# Altium PCB IBV3.PcbDoc
Units mm, origin at the board's own origin, x right, y up, seen from the top; angles counter-clockwise.
Board outline 65 x 25 mm, 2 copper layers (Top Layer, Bottom Layer); 16 components, 14 nets, 56 pads, 0 vias.
Unrouted connection lines stored in the file: 32.
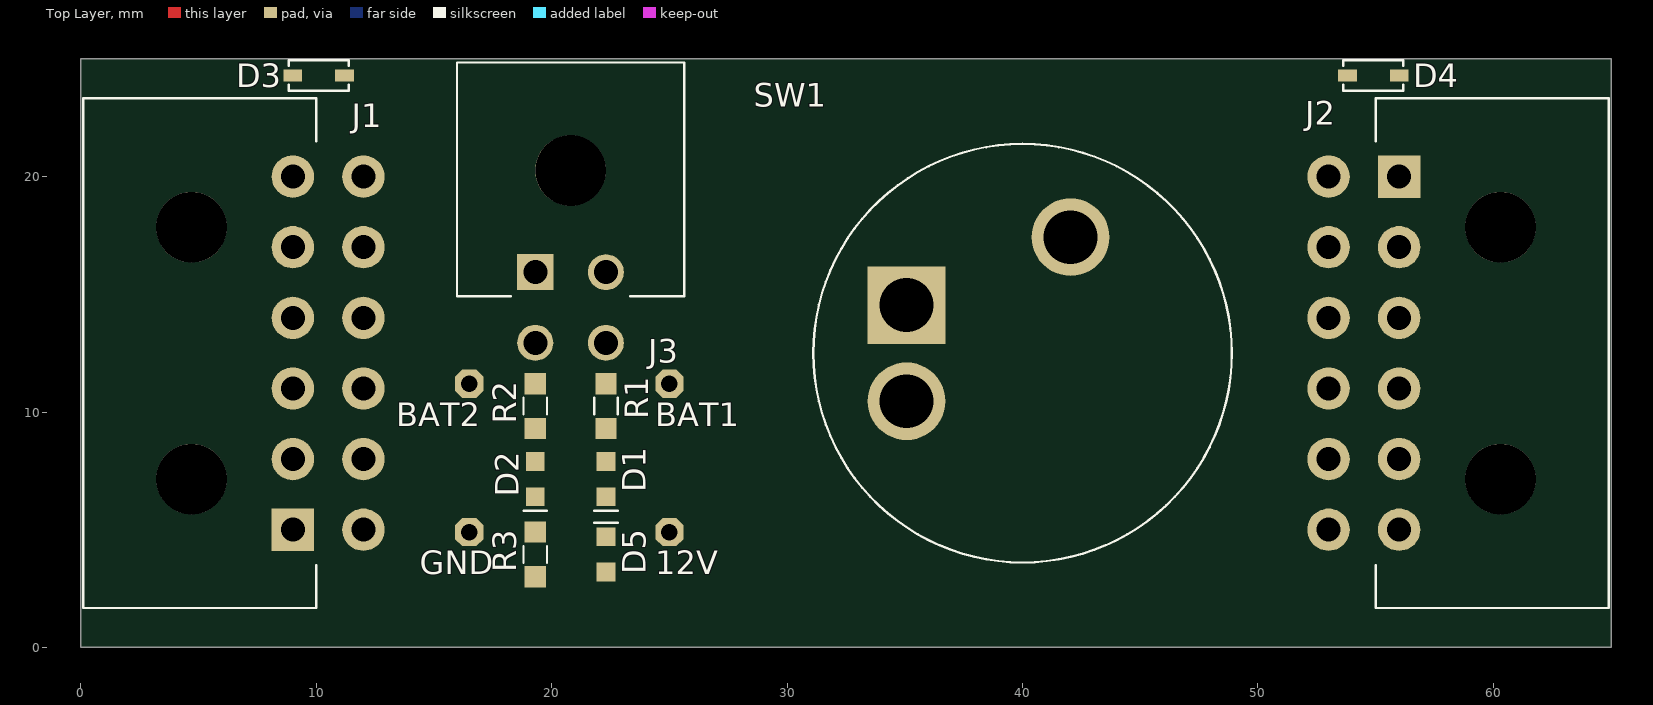
[diagram p0: Top Layer view]
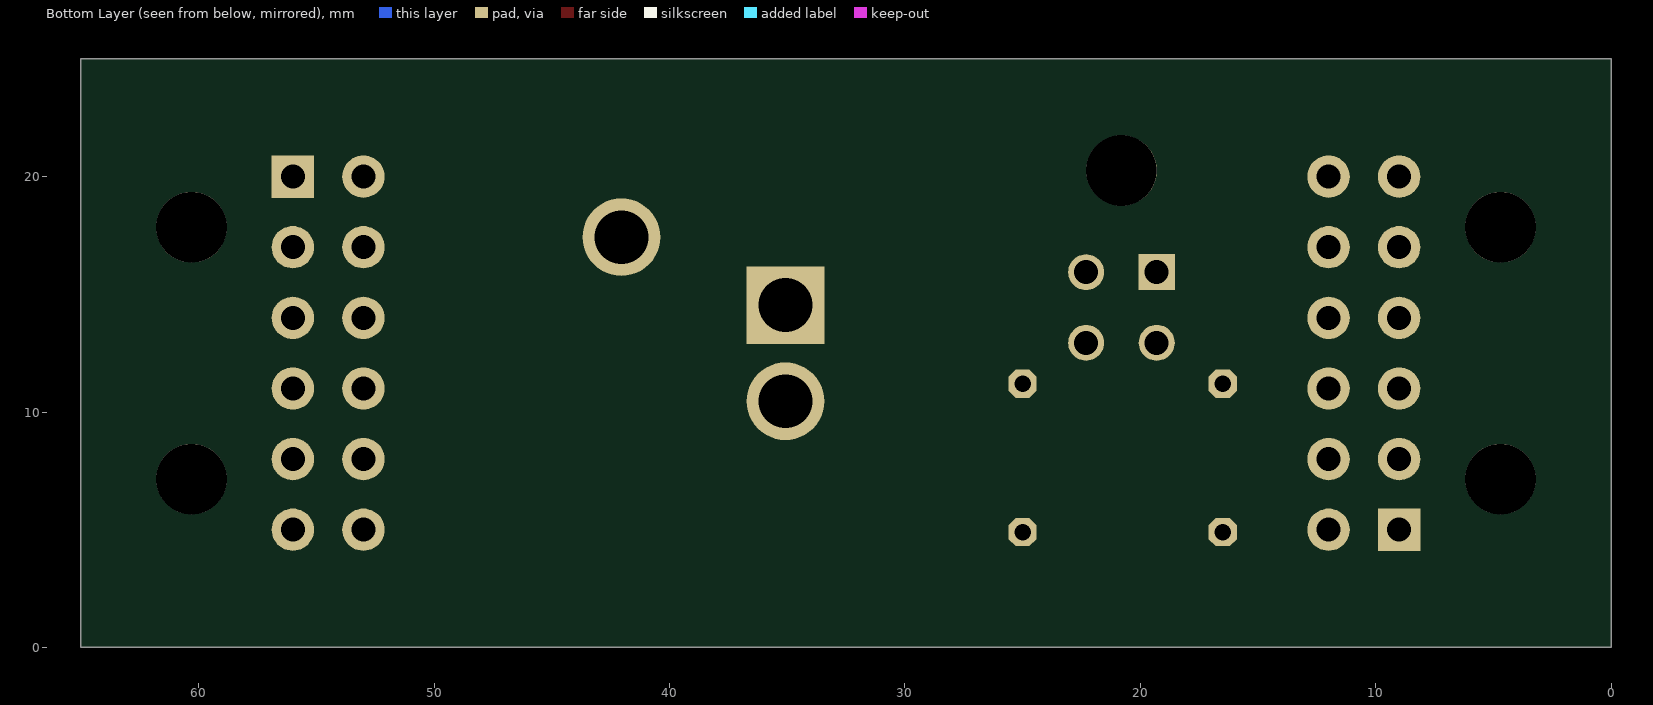
[diagram p1: Bottom Layer view, seen from below]

## Layer stack, top to bottom
Top Solder: solder mask 0.0102, Solder Resist, Dk 3.5
Top Layer: signal copper 0.0356
Dielectric 1: dielectric 0.32, FR-4, Dk 4.8
Bottom Layer: signal copper 0.0356
Bottom Solder: solder mask 0.0102, Solder Resist, Dk 3.5

## Board outline
0,0 0,25 65,25 65,0

## Design rules (kind name [scope] priority, off if disabled: settings)
Clearance [All] p1: gap=0.254 ignorepadtopadclearanceinfootprint=FALSE except(0: Arc-Hole Track-Hole SMDPad-Hole THPad-Hole Via-Hole Fill-Hole Poly-Hole Region-Hole Text-Hole)
Height [All] p1: minheight=0 maxheight=30 prefheight=12.7
HoleSize [All] p1: absolutevalues=TRUE maxlimit=10 minlimit=0.025 maxpercent=80.000 minpercent=20.000
MinimumSolderMaskSliver [All] p1: minsoldermaskwidth=0.076
PolygonConnect [All] p1: connectstyle=Relief reliefconductorwidth=0.254 reliefentries=4 polygonreliefangle="90 Angle" airgapwidth=0.254
RoutingVias [All] p1: holewidth=0.35 width=0.7 viastyle="Through Hole" minholewidth=0.25 minwidth=0.5 maxholewidth=0.711 maxwidth=1.27
SilkToSilkClearance [All] p1: silktosilkclearance=0.1
SilkToSolderMaskClearance [IsPad] p1: minsilkscreentomaskgap=0.09 clearancetoexposedcopper=TRUE
SolderMaskExpansion [All] p1: expansion=0.05
Width [All] p1: maxlimit=1.2 minlimit=0.2 preferedwidth=0.25 minimp=50.000000 maximp=50.000000 favimp=50.000000
25 further rules are at their usual default settings.

## Components (designator, comment, footprint, x,y, rotation, side; value= is the part's Value field where it differs from the comment)
12V "Testpoint" Testpoint 25,4.9 r90 top
BAT1 "Testpoint" Testpoint 25,11.2 r90 top
BAT2 "Testpoint" Testpoint 16.5,11.2 r90 top
D1 "LTST-C191KGKT" LTST-C191KGKT 22.3,7.15 r90 top
D2 "LTST-C191KGKT" LTST-C191KGKT 19.3,7.15 r90 top
D3 "CDSOD323-T12C" CDSOD323-T12C 10.1,24.3 r0 top
D4 "CDSOD323-T12C" CDSOD323-T12C 54.9,24.3 r180 top
D5 "LTST-C191KGKT" LTST-C191KGKT 22.3,3.95 r270 top
GND "Testpoint" Testpoint 16.5,4.9 r0 top
J1 "10132449-1221GLF" 10132449-1221GLF 8.35,12.5 r270 top
J2 "10132449-1221GLF" 10132449-1221GLF 56.65,12.5 r90 top
J3 "0430450400" 0430450400 20.8,16.6 r180 top
R1 "ERA-3AEB2491V" 0603[1608] 22.3,10.254 r270 top
R2 "ERA-3AEB2491V" 0603[1608] 19.3,10.254 r270 top
R3 "ERA-3AEB2491V" 0603[1608] 19.3,3.95 r270 top
SW1 "Y101132C203NQ" Y101132C203NQ 40,12.5 r0 top

## Footprints (in the part's own frame and the unit in brackets; to place one, negate y for a bottom-side part, rotate by r counter-clockwise, add the part's x,y. Pads: shape width x height; smd on the part's side, far side on the other; paste and mask are expansions set on the pad)
0603[1608] [mm]
  rect 0.9x0.9 smd mask+0.05: 1(-0.95,0) 2(0.95,0)
  silkscreen extent -0.35,-0.5 0.35,0.5, body extent -0.85,-0.45 0.85,0.45, height 0.55
10132449-1221GLF [mm] "CONN HEADER R/A 12POS 3MM"
  rect 1.8x1.8 hole 1.02 mask+0.05: 1(7.5,0.65)
  round 1.8 hole 1.02 mask+0.05: 2(7.5,3.65) 3(4.5,0.65) 4(4.5,3.65) 5(1.5,0.65) 6(1.5,3.65) 7(-1.5,0.65) 8(-1.5,3.65) 9(-4.5,0.65) 10(-4.5,3.65) 11(-7.5,0.65) 12(-7.5,3.65)
  round 3 hole 3 mask+0.05: ""(-5.35,-3.65) ""(5.35,-3.65)
  silkscreen extent -10.82,-8.25 10.82,1.65, body extent -10.82,-8.25 10.83,3.97, height 8.78
0430450400 [mm] "4-Pin Molex 3.00mm Pitch"
  round 3 hole 3 unplated mask+0.05: 0(0,-3.66)
  rect 1.53x1.53 hole 1.02 mask+0.05: 1(1.5,0.66)
  round 1.53 hole 1.02 mask+0.05: 2(-1.5,0.66) 3(1.5,3.66) 4(-1.5,3.66)
  silkscreen extent -4.82,-8.25 4.83,1.67, body extent -5.05,-8.25 5.1,3.99, height 8.83
CDSOD323-T12C [mm] "TVS DIODE 12V 28.3V SOD323"
  rect 0.8x0.5 smd mask+0.05: 1(-1.1,0) 2(1.1,0)
  silkscreen extent -1.28,-0.65 1.28,0.65, body extent -1.27,-0.65 1.27,0.65, height 1
LTST-C191KGKT [mm] "Green 571nm LED Indication - Discrete 2V 0603"
  rect 0.8x0.8 smd paste-3 mask+0.05: 1(-0.75,0) 2(0.75,0)
  silkscreen extent -1.35,-0.5 -1.35,0.5, body extent -0.8,-0.4 0.8,0.4, height 0.8
Testpoint [mm] "0.7MMD, 1.2MMW, 1.2MML"
  oct 1.2x1.2 hole 0.7 mask+0.05: 1(0,0)
Y101132C203NQ [mil] "SWITCH KEYLOCK 2POS SPDT 4A 125V"
  rect 130x130 hole 90 mask+1.97: 1(-194.01,80.36)
  round 130 hole 90 mask+1.97: 3(80.36,194.01) 8(-194.01,-80.36)
  silkscreen extent -350,-350 350,350, body extent -457,-457 457,458, height 1148

## Part data
12V BAT1 BAT2 GND: "TESTPOINT 0.7MMD Hole, 1.2MMW, 1.2MML"
D1 D2 D5: "LED GREEN CLEAR SMD 0603", Colour=Green, Current - Test=20mA, Lens Color=Colourless, Manufacturer="Lite-On Inc.", Millicandela Rating=35mcd, Package / Case="0603 (1608 Metric)", Supplier Part Number 1=160-1446-1-ND, Voltage - Forward (Vf) (Typ)=2V, ComponentLink1Description=Datasheet, ComponentLink1URL=http://optoelectronics.liteon.com/upload/download/DS22-2000-228/LTST-C191KGKT.PDF, Height (Max)=0.65mm, Lens Size="1.10mm x 0.80mm", Lens Style="Rectangle with Flat Top", Lens Transparency=Clear, Manufacturer Part Number=LTST-C191KGKT, Mounting Type="Surface Mount", Size / Dimension="1.60mm L x 0.80mm W", Supplier 1=Digi-Key, Viewing Angle=130°, Wavelength - Dominant=571nm, Wavelength - Peak=574nm
D3 D4: "TVS DIODE 12V 28.3V SOD323", ComponentLink1Description=Datasheet, ComponentLink1URL=https://www.bourns.com/docs/Product-Datasheets/CDSOD323-TxxC.PDF
J1 J2: "CONN HEADER R/A 12POS 3MM", Insulation Color=Black, Manufacturer="Amphenol ICC (FCI)", Material Flammability Rating="UL94 V-0", Operating Temperature="-40°C ~ 105°C", Supplier Part Number 1=609-5289-ND, Voltage Rating=250V, ComponentLink1Description=Datasheet, ComponentLink1URL=https://cdn.amphenol-icc.com/media/wysiwyg/files/documentation/datasheet/boardwiretoboard/bwb_minitekpwr3.0_hcc.pdf?__cf_chl_jschl_tk__=5b50c337d7977d3136f5a7e9c1a5138446a86722-1578191481-0-AdRe7fXYrldvOZ_oqyXIDS1Fw-yIkYCF-QCdaR8gv5bvudzwMePuF1OnY_qX9R1SRbUtnU8KyfMeQWvo-tgbYDs0UY0fEf2VYly7RnE44wN6RCRwe79pwwTkwB-vrp_E3FFt_m8Gv1l0VQgfDvqJJh9NWsFdXN6uiHYgEWJHQlxni9pgO_Rgu9b74Q_adNTuUPkDts4F_sjwuXFS2gwZ4qhDRVIbOsJk9z2IFwtIQbJe2Vjr12REDPUJnSIFI5L_m3PVR56FMV99EE0fexLx9E4Xzm8z4yXY4QuL_nxicuZLnFM8rKw84cv6VQDtrcv1h8b5URSWpnxkbKmN-6xqBT_N2gwuiomQytubllip4AB4QtXNO4uZy8p0Kaq8ZXDsS9f0XOGpGrNCvURFRCr5YrB2nakG2mZwStZMD_Rr-W-x1kEQ5VT0_Uar3vHfURsPPw, ComponentLink2Description=Drawing, ComponentLink2URL=https://cdn.amphenol-icc.com/media/wysiwyg/files/drawing/10132449.pdf?__cf_chl_jschl_tk__=3fb7538f61705fd3db72d6547b71e22025aaeae6-1578191484-0-ARZmBU2d2iTfwOyvkDW6juGvz8Wa7jPk-lPTAGC3bi6AwA2PAOw_83XbqimUoaj63c73oghkBl5EBlxfVnJt5FnKIy9_Ampqry6wpxN3P9yFfGzzu2bzrkjXc8H98cNGfE4yNZOx4lVYAc0DYF8iUgUBt3ot3PAqRWTuL_OE0dIKXvMd7u_4fU7igR1oB3QBFAu564mexcV1Dg4phJ9BA4kHFs6CIC10MmA2ZlPsaDWmfr6ivcYRarJOnVBN46Piz5s9Rafd2OkXuSIM4yJjlli4dKOItRDrJD3hRC0iA9RVgXipc9Ibd3Qny2RaW6xQiV-dovtBkpyFUGJQUyK5Difre6fQiv59Vrr2PfvD74WBgrERIBaIQ4JCRXFCC0XHSA, Contact Finish - Mating=Tin, Contact Finish - Post=Tin, Contact Length - Post="0.126\" (3.20mm)", Contact Material="Copper Alloy", Contact Shape=Square, Contact Type="Male Pin", Fastening Type="Locking Ramp", Features="Board Lock, Glow Wire Compliant", Insulation Height="0.343\" (8.71mm)", Insulation Material="Polyamide (PA9T), Nylon 9T", Manufacturer Part Number=10132449-1221GLF, Mounting Type="Through Hole, Right Angle", Number of Positions=12, Number of Positions Loaded=All, Number of Rows=2, Pitch - Mating="0.118\" (3.00mm)", Row Spacing - Mating="0.118\" (3.00mm)", Shrouding="Shrouded - 4 Wall", Style="Board to Cable/Wire", Supplier 1=Digi-Key, Termination=Solder
J3: "CONN HEADER R/A 4POS 3MM", Current Rating (Amps)=8A, Insulation Color=Black, Manufacturer=Molex, Material Flammability Rating="UL94 V-0", Supplier Part Number 1=WM1814-ND, Voltage Rating=600V, ComponentLink1Description=Datasheet, ComponentLink1URL=https://www.molex.com/pdm_docs/sd/430450400_sd.pdf, ComponentLink2Description="Product Specification", ComponentLink2URL=https://www.molex.com/pdm_docs/ps/PS-43045.pdf, Contact Finish - Mating=Tin, Contact Finish - Post=Tin, Contact Finish Thickness - Mating="100.0µin (2.54µm)", Contact Length - Post="0.125\" (3.18mm)", Contact Material=Brass, Contact Shape=Square, Contact Type="0.118\" (3.00mm)", Fastening Type="Locking Ramp", Features="Board Lock", Insulation Height="0.290\" (7.37mm)", Insulation Material="Liquid Crystal Polymer (LCP), Glass Filled", Manufacturer Part Number=0430450400, Mounting Type="Through Hole, Right Angle", Number of Positions=4, Number of Rows=2, Row Spacing - Mating="0.118\" (3.00mm)", Shrouding="Shrouded - 4 Wall", Supplier 1=Digi-Key, Termination=Solder
R1 R2 R3: "RES SMD 2.49KOHM 0.1% 1/10W 0603", Manufacturer="Panasonic Electronic Components", Operating Temperature="-55°C ~ 155°C", Package="0603 (1608 Metric)", Power  (W)=0.1W, Resistance=2.49K, Supplier Part Number 1=P2.49KDBCT-ND, Temperature Coefficient=±25ppm/°C, Tolerance=±0.1%, ComponentLink1Description=Datasheet, ComponentLink1URL=https://industrial.panasonic.com/cdbs/www-data/pdf/RDM0000/AOA0000C307.pdf, Composition="Thin Film", Manufacturer Part Number=ERA-3AEB2491V, Supplier 1=Digi-Key
SW1: "SWITCH KEYLOCK 2POS SPDT 4A 125V", Current Rating (Amps)="4A (AC/DC)", Manufacturer=C&K, Supplier Part Number 1=CKN11517-ND, Voltage Rating - AC=125V, Voltage Rating - DC=28V, Actuator Type="Flat Key", Angle of Throw=90°, Circuit=SPDT, ComponentLink1Description=Datasheet, ComponentLink1URL=https://dznh3ojzb2azq.cloudfront.net/products/Switchlock/Y/documents/datasheet.pdf, Contact Finish=Silver, Contact Material=Copper, Contact Timing="Not Specified", Depth Behind Flange=28.83mm, Electrical Life="10,000 Cycles", Key Removable Positions="1 only", Manufacturer Part Number=Y101132C203NQ, Mounting Type="Panel Mount", Number of Positions=2, Panel Cutout Dimensions="Circular - 19.30mm Dia", Supplier 1=Digi-Key, Switch Function=On-On, Termination Style="Solder Lug"

## Nets (pads, with @x,y where several pads share a name; then routed paths per layer and width w, separated by ;. In a path a pad name is that pad's centre, name@x,y a point inside that pad or via, vN(x,y) a via of type N, cw(c..) or ccw(c..) an arc to the next point about the centre after c; other vN are vias at no path point)
+12: 12V.1 D3.1 D4.1 J1.11 J2.1 R3.1 SW1.8
+VBAT1: BAT1.1 J3.4 R1.1
+VBAT2: BAT2.1 J3.3 R2.1 SW1.1
GND: D1.1 D2.1 D3.2 D4.2 D5.1 GND.1 J1.10 J1.12 J2.2 J2.4 J3.1 J3.2
GS_PROP1: J1.4 J2.10
GS_PROP2: J1.6 J2.8
GS_PROP3: J1.8 J2.6
LAUNCH: J1.1 J2.11
NetD1_2: D1.2 R1.2
NetD2_2: D2.2 R2.2
NetD5_2: D5.2 R3.2
RS232-RX: J1.5 J2.7
RS232-TX: J1.3 J2.9
SOL_CTRL: J1.2 J2.12
pads on no net: J1. J1.7 J1.9 J2. J2.3 J2.5 J3.0 SW1.3

## Silkscreen, mask and mechanical layers (free items; w line width, h text height)
Board Outline:
  the board outline again, w0.1